# Altium PCB PCB1.PcbDoc
Units mil, origin at the board's own origin, x right, y up, seen from the top; angles counter-clockwise.
Board outline 1245 x 1775 mil, 2 copper layers (Top Layer, Bottom Layer); 16 components, 16 nets, 91 pads, 11 vias.
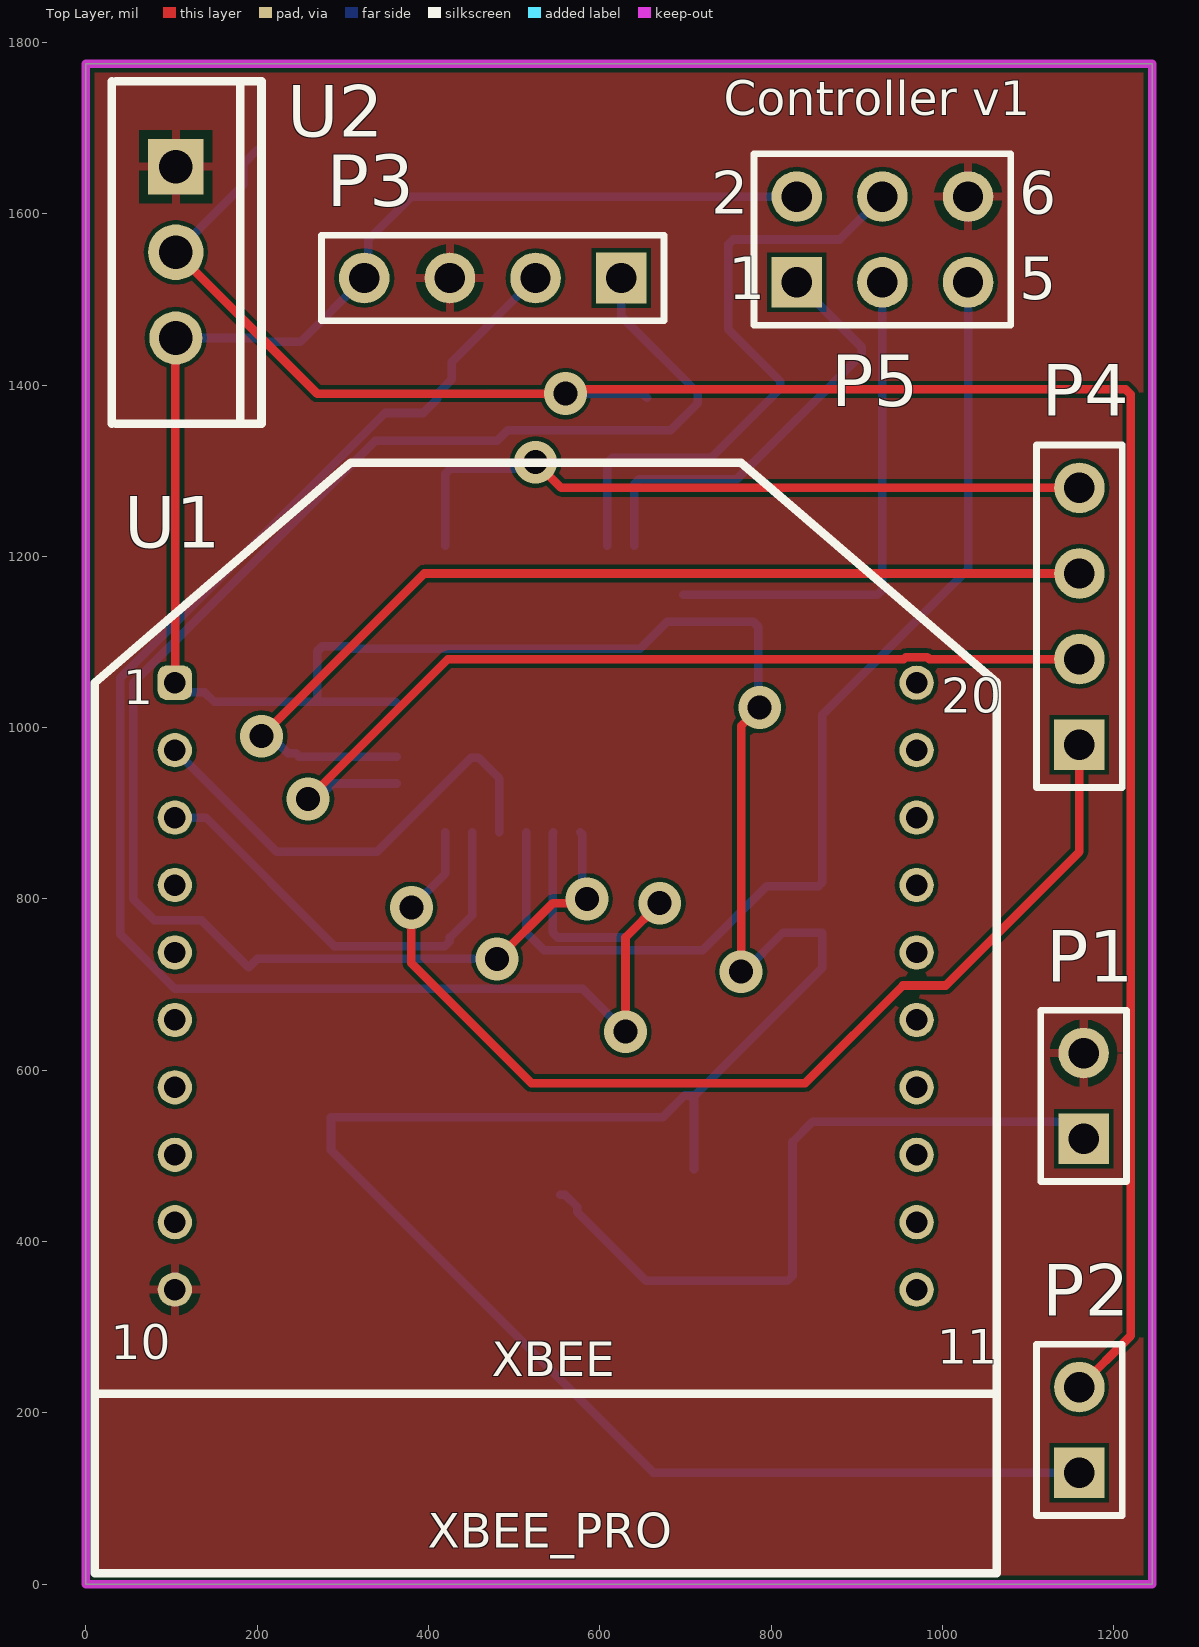
[diagram p0: Top Layer view]
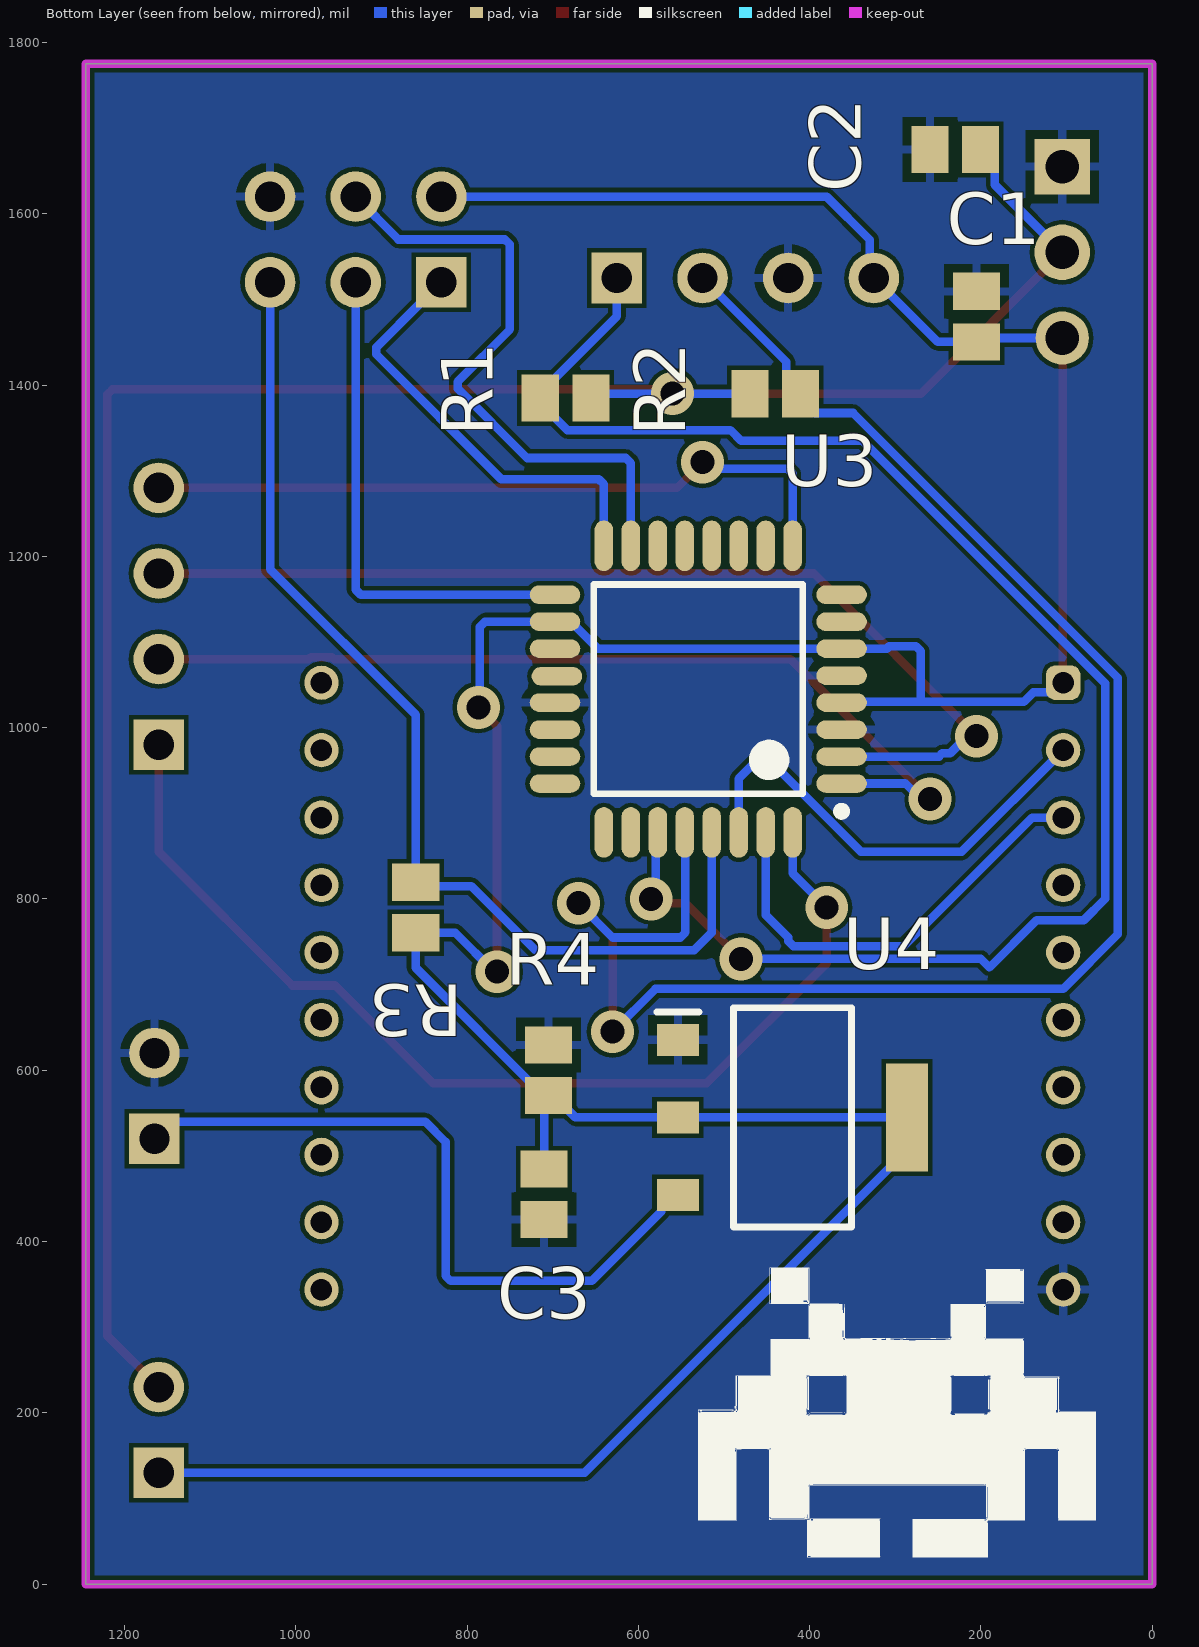
[diagram p1: Bottom Layer view, seen from below]

## Layer stack, top to bottom
Top Solder: solder mask 0.4, Solder Resist, Dk 3.5
Top Layer: signal copper 1.4
Dielectric 1: dielectric 12.6, FR-4, Dk 4.8
Bottom Layer: signal copper 1.4
Bottom Solder: solder mask 0.4, Solder Resist, Dk 3.5

## Board outline
0,0 0,1775 1245,1775 1245,0

## Design rules (kind name [scope] priority, off if disabled: settings)
Clearance [All] p1: gap=5 ignorepadtopadclearanceinfootprint=FALSE
ComponentClearance [All] p1: gap=10 collisioncheckmode=3 verticalgap=5 showdistances=FALSE
MinimumSolderMaskSliver [All] p1: minsoldermaskwidth=5
PolygonConnect [All] p1: connectstyle=Relief reliefconductorwidth=10 reliefentries=4 polygonreliefangle="90 Angle" airgapwidth=10
RoutingVias [All] p1: holewidth=28 width=50 viastyle="Through Hole" minholewidth=28 minwidth=50 maxholewidth=28 maxwidth=50
SolderMaskExpansion [All] p1: expansion=4 istentingtop=FALSE
Width [All] p1: maxlimit=10 minlimit=10 preferedwidth=10
28 further rules are at their usual default settings.

## Components (designator, comment, footprint, x,y, rotation, side; value= is the part's Value field where it differs from the comment)
C1 "Cap" C0805 205,1480 r90 bottom value=10uF
C2 "Cap" C0805 230,1675 r0 bottom value=10uF
C3 "Cap" C0805 710,455 r90 bottom value=1uF
P1 "Header 2" HDR1X2 1165,520 r90 top
P2 "Header 2" HDR1X2 1160,130 r90 top
P3 "Header 4" HDR1X4 625,1525 r180 top
P4 "Header 4" HDR1X4 1160,980 r90 top
P5 "Header 3X2" HDR2X3 830,1520 r0 top
R1 "Res1" C0805 685,1385 r0 bottom value=4.7K
R2 "Res1" C0805 440,1390 r0 bottom value=4.7K
R3 "Res1" C0805 860,790 r270 bottom value=1K
R4 "Res1" C0805 705,600 r90 bottom value=1K
U1 "XBEE" XBEE/PRO 68.86,1484.53 r0 top
U2 "LT1086  3.3V" TO-220 105,1455 r270 top
U3 "ATMEGA328P-AU" TQFP80P900X900X120-32N 530,1045 r0 bottom
U4 "LM1117IMPX-5.0_NOPB" SOT230P700X180-4N 420,545 r180 bottom

## Footprints (in the part's own frame and the unit in brackets; to place one, negate y for a bottom-side part, rotate by r counter-clockwise, add the part's x,y. Pads: shape width x height; smd on the part's side, far side on the other; paste and mask are expansions set on the pad)
C0805 [mm] "Chip Capacitor, Body 2.0x1.3mm, IPC High Density"
  rect 1.1x1.4 smd: 1(-0.75,0) 2(0.75,0)
  body extent -1.1,-0.72 1.1,0.72, height 1.4
HDR1X2 [mm] "Connector; Header; 2 Position"
  rect 1.5x1.5 hole 0.9: 1(0,0)
  round 1.5 hole 0.9: 2(2.54,0)
  silkscreen extent -1.27,-1.27 3.81,1.27
HDR1X4 [mm] "Connector; Header; 4 Position"
  rect 1.5x1.5 hole 0.9: 1(0,0)
  round 1.5 hole 0.9: 2(2.54,0) 3(5.08,0) 4(7.62,0)
  silkscreen extent -1.27,-1.27 8.89,1.27
HDR2X3 [mm] "Connector; Header; 3x2 Position"
  rect 1.5x1.5 hole 0.9: 1(0,0)
  round 1.5 hole 0.9: 2(0,2.54) 3(2.54,0) 4(2.54,2.54) 5(5.08,0) 6(5.08,2.54)
  silkscreen extent -1.27,-1.27 6.35,3.81
SOT230P700X180-4N [mm]
  rect 1.25x0.95 smd: 1(-3.4,2.3) 2(-3.4,0) 3(-3.4,-2.3)
  rect 1.25x3.2 smd: 4(3.4,0)
  silkscreen extent -4.02,-3.25 1.75,3.25, body extent -3.5,-3.25 3.5,3.25, height 1.8
TO-220 [mil]
  rect 65x65 hole 39.4: 1(-200,0)
  round 65 hole 39.4: 2(-100,0)
  round 62 hole 39.4: 3(0,0)
  silkscreen extent -300,-75 100,100
TQFP80P900X900X120-32N [mm] "TQFP, 32-Leads, Body 7.00x7.00mm, Pitch 0.80mm, IPC Medium Density"
  oval 1.5x0.55 smd: 1(-4.25,2.8) 2(-4.25,2) 3(-4.25,1.2) 4(-4.25,0.4) 5(-4.25,-0.4) 6(-4.25,-1.2) 7(-4.25,-2) 8(-4.25,-2.8) 17(4.25,-2.8) 18(4.25,-2) 19(4.25,-1.2) 20(4.191,-0.381) 21(4.25,0.4) 22(4.25,1.2) 23(4.25,2) 24(4.25,2.8)
  oval 0.55x1.5 smd: 9(-2.8,-4.25) 10(-2,-4.25) 11(-1.2,-4.25) 12(-0.4,-4.25) 13(0.4,-4.25) 14(1.2,-4.25) 15(2,-4.25) 16(2.8,-4.25) 25(2.8,4.25) 26(2,4.25) 27(1.2,4.25) 28(0.4,4.25) 29(-0.4,4.25) 30(-1.2,4.25) 31(-2,4.25) 32(-2.8,4.25)
  silkscreen extent -4.37,-3.1 3.1,3.75, body extent -4.45,-4.5 4.55,4.5, height 1.6
XBEE/PRO [mil]
  rrect50% 40x40 hole 25: 1(35,-432.09)
  round 40 hole 25: 2(35,-510.83) 3(35,-589.57) 4(35,-668.31) 5(35,-747.05) 6(35,-825.79) 7(35,-904.53) 8(35,-983.27) 9(35,-1062.01) 10(35,-1140.75) 11(901.14,-1140.75) 12(901.14,-1062.01) 13(901.14,-983.27) 14(901.14,-904.53) 15(901.14,-825.79) 16(901.14,-747.05) 17(901.14,-668.31) 18(901.14,-589.57) 19(901.14,-510.83) 20(901.14,-432.09)
  silkscreen extent -59,-1472 995,-175

## Part data
C1 C2 C3: "Capacitor", LatestRevisionDate=17-Jul-2002, LatestRevisionNote="Re-released for DXP Platform.", PackageDescription="Radial Cap, Thru-Hole; 2 Leads; 0.3 in Pin Spacing", PackageReference=RAD-0.3, Published=8-Jun-2000, Publisher="Altium Limited"
P1 P2: "Header, 2-Pin", LatestRevisionDate=17-Jul-2002, LatestRevisionNote="Re-released for DXP Platform.", Publisher="Altium Limited"
P3 P4: "Header, 4-Pin", LatestRevisionDate=17-Jul-2002, LatestRevisionNote="Re-released for DXP Platform.", Publisher="Altium Limited"
P5: "Header, 3-Pin, Dual row", LatestRevisionDate=17-Jul-2002, LatestRevisionNote="Re-released for DXP Platform.", Publisher="Altium Limited"
R1 R2 R3 R4: "Resistor", LatestRevisionDate=17-Jul-2002, LatestRevisionNote="Re-released for DXP Platform.", PackageDescription="Axial Device, Thru-Hole; 2 Leads; 0.3 in Pin Spacing", PackageReference=AXIAL-0.3, Published=8-Jun-2000, Publisher="Altium Limited"
U3: "Microchip Technology ATMEGA328P-AN, 8bit AVR Microcontroller, 20MHz, 32 kB Flash, 32-Pin TQFP", Company=Gueni, Created By="Mohamed Gueni", Datasheet URL=https://docs-emea.rs-online.com/webdocs/15b8/0900766b815b8e7b.pdf, Date="20 October 2018", RS Stock No=131-0271
U4: "Undefined or Miscellaneous", Manufacturer_Name="Texas Instruments", Manufacturer_Part_Number=LM1117IMPX-5.0/NOPB, Mouser2 Part Number=926-LM1117IMPX50NOPB, Datasheet Link=http://www.ti.com/lit/gpn/lm1117, Height=1.8mm, Mouser2 Price/Stock=https://www.mouser.com/Search/Refine.aspx?Keyword=926-LM1117IMPX50NOPB

## Via types
v1: diameter 50, hole 28, Top Layer to Bottom Layer, 11 vias

## Nets (pads, with @x,y where several pads share a name; then routed paths per layer and width w, separated by ;. In a path a pad name is that pad's centre, name@x,y a point inside that pad or via, vN(x,y) a via of type N, cw(c..) or ccw(c..) an arc to the next point about the centre after c; other vN are vias at no path point)
+3.3: C2.1 P2.2 R1.1 R2.2 U2.2 | length 2719.4
  Top Layer w10: U2.2 270,1390 v1(560,1390) 565,1395 1214.14,1395 1220,1389.14 1220,290 P2.2
  Bottom Layer w10: U2.2 183.82,1633.82 183.82,1658.35 C2.1 ; R2.2 v1(560,1390) 650.47,1390 R1.1
+5: C1.1 C3.2 P2.1 P3.4 P5.2 R3.2 R4.1 U1.1 U2.3 U3.4 U3.6 U3.18 U4.2 U4.4 | length 4451
  Top Layer w10: U1.1 104.43,1053.01 104.43,1454.43 U2.3 ; v1(765,715) 765,1001.91 v1(786.69,1023.6)
  Bottom Layer w10: U1.1 115.16,1041.14 138.86,1041.14 150,1030 270,1030 ; U2.3 200.47,1455 C1.1 250.47,1450.47 P3.4 329.53,1529.53 329.53,1569.53 380,1620 P5.2 ; U3.4 361.93,1030 270,1030 ; R4.1@707.95,567.52 710,565.47 C3.2 ; v1(765,715) 768.29,715 814.04,760.75 859.72,760.75 R3.2 860,719.57 710.91,570.47 R4.1 699.09,570.47 673.62,545 U4.2 U4.4 286.14,506.61 662.76,130 P2.1 ; v1(786.69,1023.6) 785,1025.29 785,1117.88 779.14,1123.74 U3.18 678.62,1123.74 647.13,1092.24 U3.6 309.72,1092.24 306.96,1095 275.86,1095 270,1089.14 270,1030
D2: P4.1 U3.32 | length 1244
  Top Layer w10: v1(380,790) 380,725 520,585 840,585 953.94,698.94 1003.94,698.94 1160,855 P4.1
  Bottom Layer w10: v1(380,790) 419.76,829.76 U3.32
D3: P4.2 U3.1 | length 1080.9
  Top Layer w10: v1(259.42,916.81) 422.6,1080 955.13,1080 957.57,1082.44 982.43,1082.44 984.87,1080 P4.2
  Bottom Layer w10: v1(259.42,916.81) 270.24,916.81 288.19,934.76 U3.1
D4: P4.3 U3.2 | length 1201.2
  Top Layer w10: v1(205,990) 395,1180 P4.3
  Bottom Layer w10: v1(205,990) 215.82,990 235.82,970 245,970 248.74,966.26 U3.2
D5: P4.4 U3.9 | length 842.4
  Top Layer w10: v1(525,1310) 555,1280 P4.4
  Bottom Layer w10: U3.9 419.76,1296.49 425.62,1302.35 517.35,1302.35 v1(525,1310)
GND: C1.2 C2.2 C3.1 P1.2 P3.3 P5.6 R4.2 U1.10 U2.1 U3.3 U3.5 U3.21 U4.1
PB3: P5.4 U3.15 | length 731.4
  Bottom Layer w10: U3.15 608.74,1308.98 614.6,1314.83 729.83,1314.83 810.86,1395.86 810.86,1404.14 750,1465 750,1564.14 755.86,1570 880,1570 P5.4
PB4: P5.1 U3.16 | length 515.8
  Bottom Layer w10: U3.16 640.24,1284.14 646.09,1290 760,1290 905.86,1435.86 905.86,1444.14 854.53,1495.47 P5.1
PB5: P5.3 U3.17 | length 594
  Bottom Layer w10: U3.17 924.14,1155.24 930,1161.09 P5.3
reset: P5.5 R3.1 U3.29 | length 1275.1
  Bottom Layer w10: U3.29 514.25,760.75 535,740 720,740 795,815 855.47,815 R3.1 860,1015 1030,1185 P5.5
RX: U1.2 U3.30 | length 546.6
  Bottom Layer w10: U1.2 222.56,855 340,855 450,965 458.28,965 482.76,940.53 U3.30
SCL: P3.2 R2.1 U3.28 | length 2057.9
  Top Layer w10: v1(630,645) 630,755 v1(670,795)
  Bottom Layer w10: P3.2 427.13,1427.13 427.13,1406.65 R2.1 410.47,1384.09 393.82,1367.44 349.36,1367.44 40,1058.08 40,758.91 103.91,695 580,695 v1(630,645) ; U3.28 545,876.93 545,760.86 550.86,755 630,755 v1(670,795)
SDA: P3.1 R1.2 U3.27 | length 1907.1
  Top Layer w10: v1(480,730) 545,795 580,795 v1(585,800)
  Bottom Layer w10: v1(480,730) 200,730 190,720 135,775 80,775 55,800 55,1051.87 338.13,1335 480,1335 492.44,1347.44 682.87,1347.44 714.53,1379.09 R1.2 714.53,1390.91 625,1480.43 P3.1 ; U3.27 579.47,875.45 579.47,805.53 v1(585,800)
TX: U1.3 U3.31 | length 523.4
  Bottom Layer w10: U1.3 140.04,894.96 290,745 419.14,745 425,750.86 425,755 451.26,781.26 U3.31
VCC: P1.1 U4.3 | length 833.3
  Bottom Layer w10: U4.3 559.76,454.45 573.46,440.75 573.46,434.84 654.37,353.93 819.14,353.93 825,359.79 825,516.28 848.72,540 1145,540 P1.1
pads on no net: U1.4 U1.5 U1.6 U1.7 U1.8 U1.9 U1.11 U1.12 U1.13 U1.14 U1.15 U1.16 U1.17 U1.18 U1.19 U1.20 U3.7 U3.8 U3.10 U3.11 U3.12 U3.13 U3.14 U3.19 U3.20 U3.22 U3.23 U3.24 U3.25 U3.26

## Polygon pours and split planes (outlines as drawn)
GND on Bottom Layer "GND_L02_P000" (solid, pour order 0): 0,1775 1245,1775 1245,0 0,0
GND on Bottom Layer "GND_L02_P001" (solid, pour order 1): 1440,300
GND on Top Layer "GND_L01_P002" (solid, pour order 2): 0,1775 1245,1775 1245,0 0,0

## Keep-outs
Keep-Out Layer:
  the board outline again, w10

## Silkscreen, mask and mechanical layers (free items; w line width, h text height)
Top Overlay:
  text "Controller v1" at 745,1715 h40
Bottom Overlay:
  drawing of 21 lines, arcs and shapes, not listed

## Text inside footprints (layer, text, board x,y; h text height)
P5: Top Overlay "1" at 750,1500 h50; Top Overlay "2" at 730,1600 h50; Top Overlay "5" at 1090,1500 h50; Top Overlay "6" at 1090,1600 h50
U1: Top Overlay "20" at 998.86,1017.44 h40; Top Overlay "11" at 993.86,257.44 h40; Top Overlay "10" at 28.86,262.44 h40; Top Overlay "1" at 43.86,1027.44 h40; Top Overlay "XBEE_PRO" at 398.86,42.44 h40